# Altium PCB EST_MainV20.PcbDoc (part 2 of 8)
Units mm, origin at the board's own origin, x right, y up, seen from the top; angles counter-clockwise.
Board outline 69.72 x 115.32 mm, 2 copper layers (Top Layer, Bottom Layer); 330 components, 239 nets, 1066 pads, 416 vias.
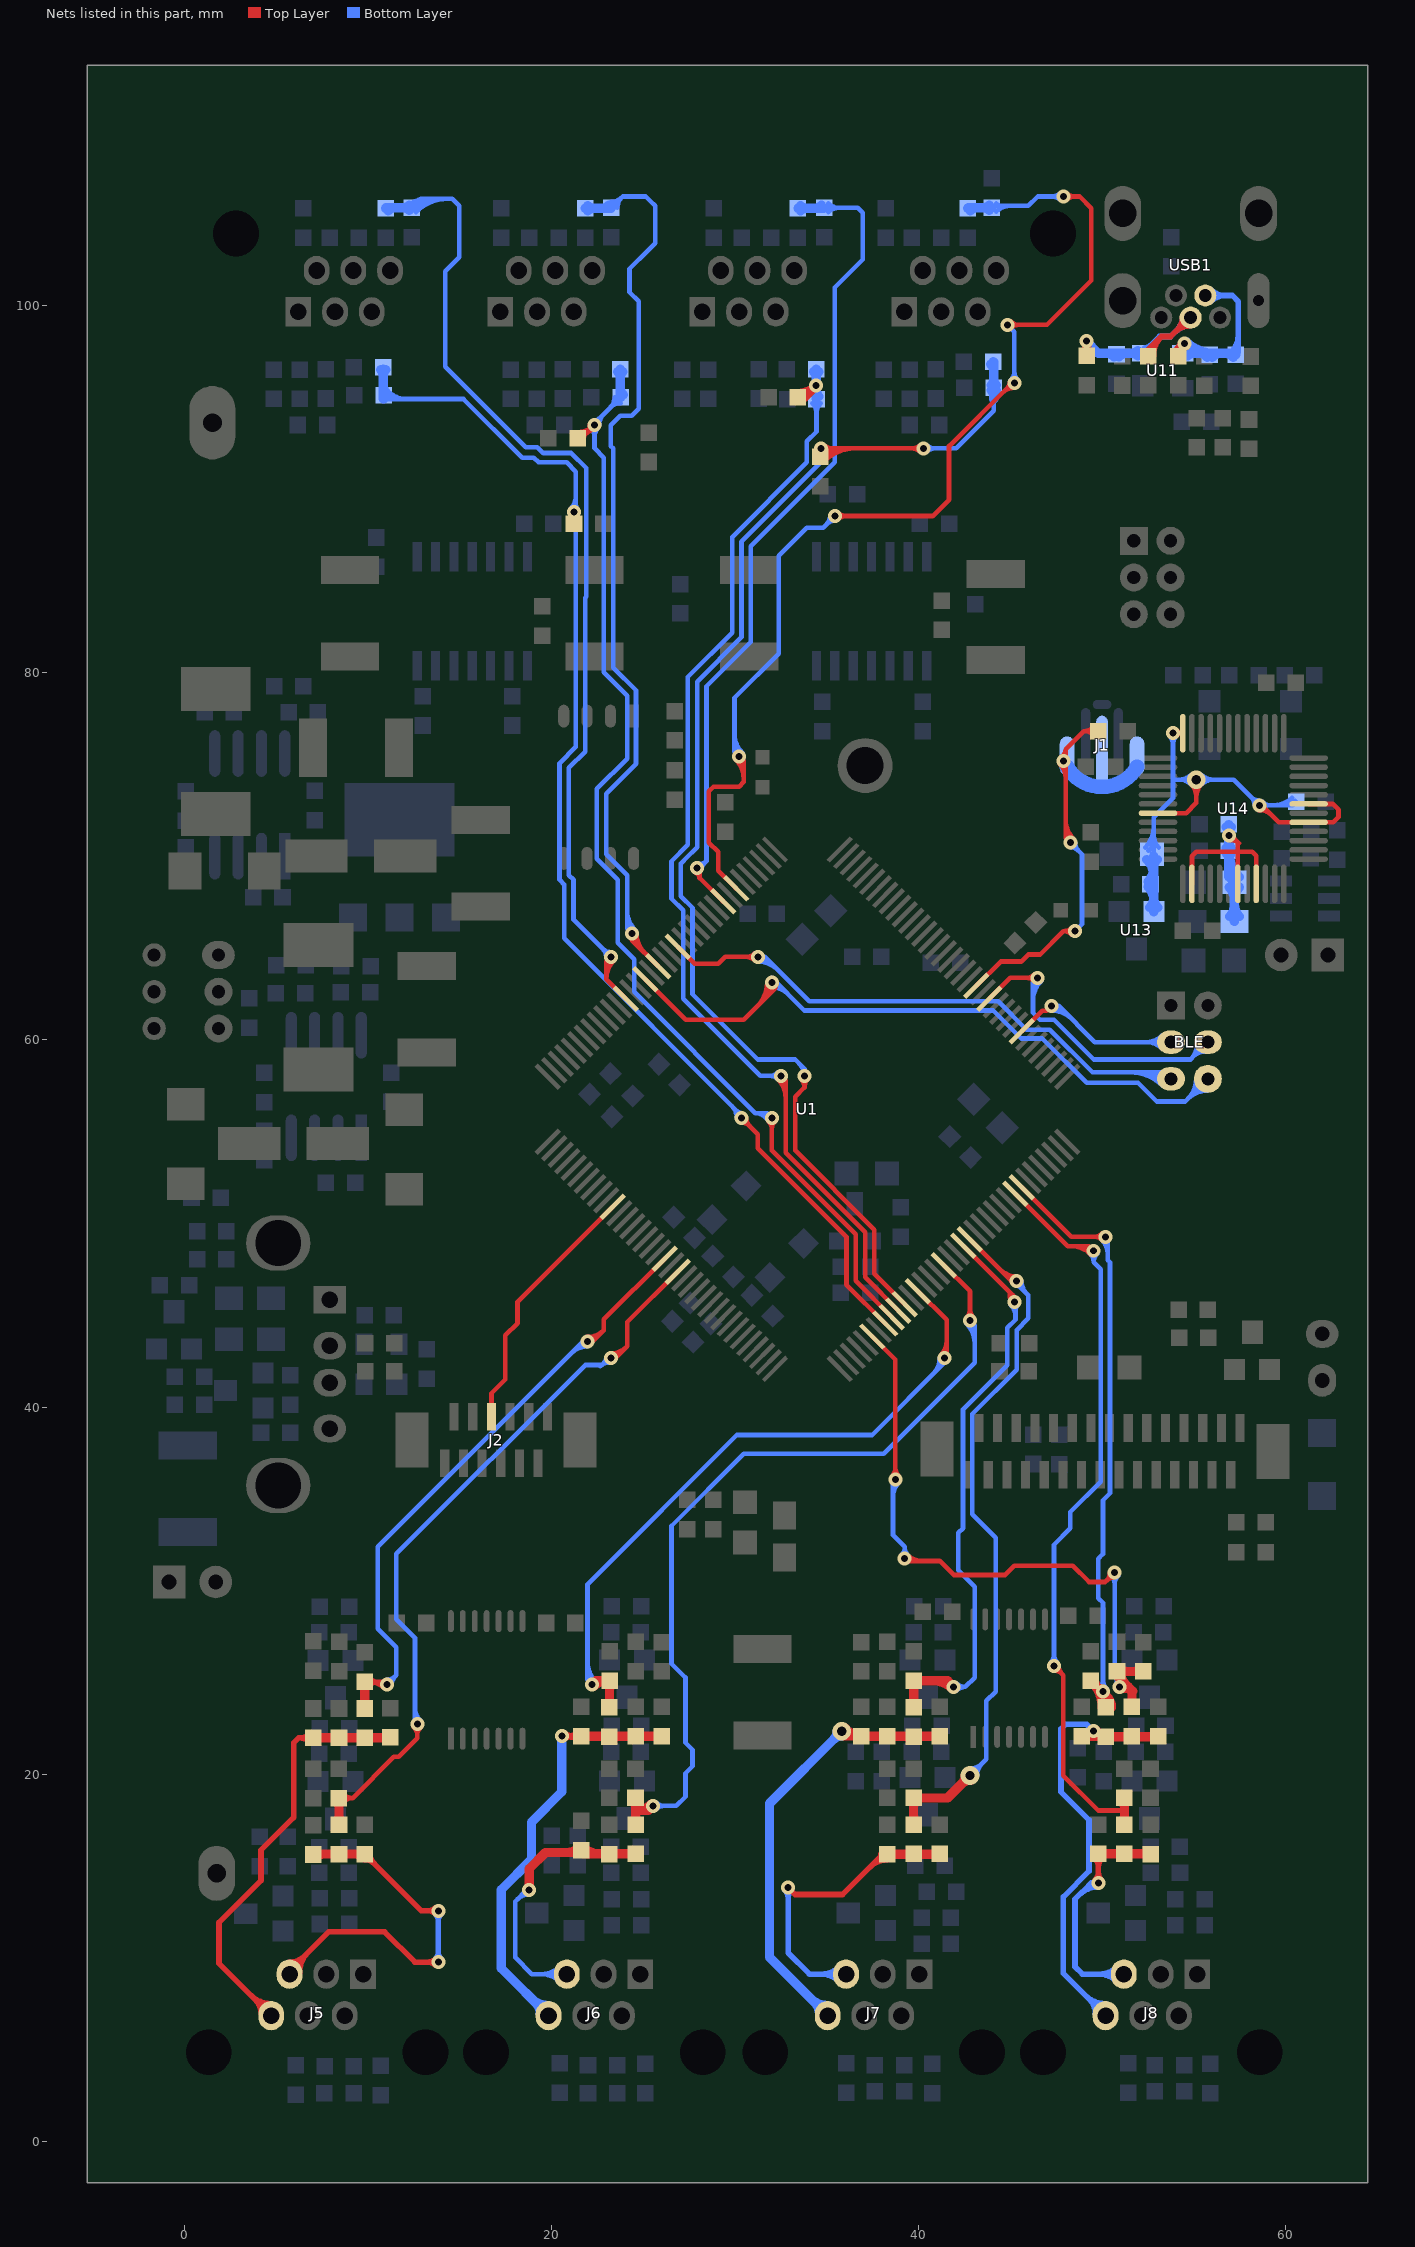
[diagram p2: the nets of this part, all layers, seen from the top]

## Via types
v1: diameter 0.762, hole 0.381, Top Layer to Bottom Layer, 258 vias
v2: diameter 1.27, hole 0.635, Top Layer to Bottom Layer, 91 vias
v3: diameter 1.016, hole 0.508, Top Layer to Bottom Layer, 66 vias
v4: diameter 1.524, hole 0.635, Top Layer to Bottom Layer, 1 vias

## Nets (pads, with @x,y where several pads share a name; then routed paths per layer and width w, separated by ;. In a path a pad name is that pad's centre, name@x,y a point inside that pad or via, vN(x,y) a via of type N, cw(c..) or ccw(c..) an arc to the next point about the centre after c; other vN are vias at no path point) (continued)
ADC_D1: C35.2 R86.2 R93.1 U1.42 | length 45.3
  Top Layer w0.254: U1.42@37.483,43.845 38.735,42.593 v1(38.735,36.068) v1@38.735,35.941 ; v1@38.555,36.248 ccw(c38.122,36.681) 38.735,36.681 ccw(c39.348,36.681) v1@38.915,36.248 ; v1(39.243,31.75) 39.37,31.623 41.148,31.623 41.91,30.861 44.704,30.861 45.212,31.369 48.387,31.369 49.276,30.48 50.165,30.48 v1(50.673,30.988) ; v1@39.423,31.93 ccw(c40.163,32.67) 40.163,31.623 ; v1@50.419,30.988 cw(c49.806,30.988) 50.239,30.554 cw(c50.673,30.121) v1@50.673,30.734
  Top Layer w0.508: R93.1@50.8,25.375 51.41,24.765 ; R93.1@50.8,25.629 50.823,25.606 C35.2@52.226,25.606 ; v1(50.927,24.765) 51.41,24.765 ; R93.1@50.939,25.767 ccw(c51.327,26.155) 51.327,25.606 ; v1@50.978,24.649 cw(c51.224,24.096) 51.651,24.524 ; R93.1@50.996,25.621 ccw(c51.977,25.586) v1@51.283,24.892 ; R86.2@51.475,23.811 ccw(c51.14,24.146) 51.613,24.146 ccw(c52.086,24.146) R86.2@51.752,23.811 ; R86.2@51.613,23.673 51.613,24.562 51.41,24.765 ; C35.2@52.088,25.468 ccw(c51.753,25.133) 51.753,25.606 ccw(c51.753,26.08) C35.2@52.088,25.745
  Bottom Layer w0.254: 38.608,35.148 cw(c39.655,35.148) v1@38.915,35.888 ; v1@38.735,35.941 38.608,35.814 38.608,33.02 39.243,32.385 v1(39.243,31.75) ; v1@39.063,31.93 ccw(c38.63,32.363) 39.243,32.363 ccw(c39.856,32.363) v1@39.423,31.93 ; v1@50.493,30.808 cw(c50.06,30.375) 50.673,30.375 cw(c51.286,30.375) v1@50.853,30.808 ; v1(50.673,30.988) 50.673,25.527 50.8,25.4 ; v1(50.927,24.765) 50.8,24.892 50.8,25.4 ; v1@51.047,24.989 cw(c51.266,25.4) 50.8,25.4
ADCMA: C43.2 R101.1 R171.2 U1.44 | length 77.3
  Top Layer w0.254: R171.2@21.037,88.343 ccw(c20.722,88.747) v1(21.235,88.747) ; v1@21.055,88.568 cw(c20.621,88.134) 21.235,88.134 cw(c21.848,88.134) v1@21.414,88.568 ; R171.2@21.235,88.088 v1(21.235,88.747) ; R171.2@21.433,88.343 cw(c21.747,88.747) v1(21.235,88.747) ; v1@30.353,55.499 cw(c30.353,54.886) 30.787,55.319 cw(c31.22,55.753) v1@30.607,55.753 ; v1(30.353,55.753) 31.242,54.864 31.242,54.102 36.068,49.276 36.068,46.674 U1.44@38.19,44.552
  Bottom Layer w0.254: C43.2@10.868,94.89 15.219,94.89 18.415,91.694 19.05,91.694 19.304,91.44 19.431,91.44 20.828,91.44 21.336,90.932 21.336,75.946 20.447,75.057 20.447,68.707 20.701,68.453 20.701,65.532 30.353,55.88 v1(30.353,55.753) ; C43.2@10.917,95.142 ccw(c11.525,95.751) 11.525,94.89 ; C43.2@11.096,95.322 ccw(c12.138,96.364) 12.138,94.89 ; v1@21.055,88.568 cw(c20.377,87.889) 21.336,87.889 ; v1@21.055,88.927 ccw(c20.377,89.605) 21.336,89.605 ; 21.336,88.379 cw(c21.603,88.379) v1@21.414,88.568 ; 21.336,89.116 ccw(c21.603,89.116) v1@21.414,88.927 ; 29.83,56.403 cw(c29.179,55.753) v1@30.099,55.753 ; 30.136,56.097 ccw(c30.353,56.314) v1@30.353,56.007
  Bottom Layer w0.508: R101.1@10.707,96.483 cw(c10.373,96.148) 10.846,96.148 cw(c11.319,96.148) R101.1@10.984,96.483 ; 10.846,95.62 ccw(c11.395,95.62) C43.2@11.007,95.232 ; R101.1@10.846,96.52 10.846,94.913 C43.2@10.868,94.89
ADCMB: C44.2 R103.1 R172.2 U1.45 | length 71.3
  Top Layer w0.254: R172.2@21.437,92.557 v1(22.352,93.472) ; R172.2@21.437,92.829 ccw(c21.437,93.487) 21.902,93.022 ; R172.2@21.437,93.083 ccw(c21.437,94.354) v1@22.336,93.455 ; R172.2@21.76,92.76 cw(c22.05,92.76) R172.2@21.845,92.965 ; 21.918,93.038 ccw(c21.484,93.472) v1@22.098,93.472 ; 21.919,93.039 cw(c22.352,92.605) v1@22.352,93.218 ; v1@31.824,55.573 cw(c31.391,55.14) 32.004,55.14 cw(c32.617,55.14) v1@32.184,55.573 ; v1(32.004,55.753) 32.004,53.975 36.576,49.403 36.576,46.873 U1.45@38.544,44.906
  Bottom Layer w0.254: v1@22.172,93.292 cw(c21.739,92.859) 22.352,92.859 cw(c22.965,92.859) v1@22.532,93.292 ; v1@22.352,93.726 ccw(c22.352,94.096) 22.614,93.834 ; v1@22.606,93.472 cw(c23.463,93.472) 22.857,94.078 ; C44.2@23.448,94.992 cw(c22.668,94.992) 23.22,94.441 cw(c23.771,93.889) C44.2@23.771,94.669 ; C44.2@23.771,94.992 22.352,93.573 v1(22.352,93.472) 22.352,92.202 22.86,91.694 22.86,80.01 24.13,78.74 24.13,75.311 22.479,73.66 22.479,69.85 23.622,68.707 23.622,65.278 24.511,64.389 24.511,62.611 31.115,56.007 ; 31.56,56.007 cw(c31.56,55.491) v1(32.004,55.753) 31.75,56.007 31.115,56.007 ; v1@31.785,55.624 ccw(c31.115,55.229) 31.115,56.007
  Bottom Layer w0.508: R103.1@23.61,96.381 cw(c23.276,96.046) 23.749,96.046 cw(c24.222,96.046) R103.1@23.888,96.381 ; 23.749,95.519 ccw(c24.298,95.519) C44.2@23.91,95.131 ; R103.1@23.749,96.52 23.749,95.014 C44.2@23.771,94.992
ADCMC: C51.2 R119.1 R173.2 U1.46 | length 68.1
  Top Layer w0.254: v1@32.332,57.859 cw(c31.286,56.813) 32.766,56.813 ; 32.766,57.426 ccw(c31.899,57.426) v1(32.512,58.039) 32.766,57.785 32.766,53.848 37.084,49.53 37.084,47.072 U1.46@38.897,45.259
  Top Layer w0.508: R173.2@33.426,94.996 33.782,94.996 v1(34.417,95.631) ; R173.2@33.426,95.192 ccw(c33.426,96.523) v1@34.367,95.581
  Bottom Layer w0.254: v1@32.332,57.859 ccw(c31.899,57.426) 31.899,58.039 ccw(c31.899,58.652) v1@32.332,58.219 ; v1@32.766,58.039 v1(32.512,58.039) 31.369,58.039 27.178,62.23 27.178,67.056 26.543,67.691 26.543,68.707 26.543,69.723 27.432,70.612 27.432,79.756 29.845,82.169 29.845,87.376 33.909,91.44 33.909,92.583 34.439,93.113 C51.2@34.439,94.89 ; C51.2@34.211,94.662 cw(c33.659,94.111) 34.439,94.111 cw(c35.219,94.111) C51.2@34.668,94.662
  Bottom Layer w0.508: R119.1@34.278,96.381 cw(c33.944,96.046) 34.417,96.046 cw(c34.89,96.046) R119.1@34.556,96.381 ; C51.2@34.417,94.913 v1(34.417,95.631) R119.1@34.417,96.52 ; v1@34.417,95.417 ccw(c34.966,95.417) C51.2@34.578,95.029
ADCMD: C52.2 R121.1 R174.2 U1.47 | length 81.5
  Top Layer w0.254: v1@33.602,57.859 cw(c33.169,57.426) 33.782,57.426 cw(c34.395,57.426) v1@33.962,57.859 ; v1(33.782,58.039) 33.782,57.404 33.274,56.896 33.274,53.975 37.592,49.657 37.592,47.271 U1.47@39.251,45.613 ; R174.2@34.336,92.055 cw(c34.69,91.7) v1@34.69,92.202 ; R174.2@34.515,91.875 cw(c35.304,91.087) 35.304,92.202 ; v1(34.671,92.202) v1(40.259,92.202) ; R174.2@34.695,91.696 cw(c35.917,90.474) 35.917,92.202 ; R174.2@34.851,92.022 cw(c35.284,91.589) 35.284,92.202 cw(c35.284,92.815) v1@34.851,92.382 ; R174.2@34.874,91.516 cw(c36.53,89.861) 36.53,92.202 ; v1@40.079,92.022 ccw(c39.646,91.589) 39.646,92.202 ccw(c39.646,92.815) v1@40.079,92.382
  Bottom Layer w0.254: 27.178,69.723 27.305,69.85 ; 33.515,58.687 cw(c32.87,58.042) v1(33.782,58.039) 33.782,58.42 33.274,58.928 31.242,58.928 27.686,62.484 27.686,67.183 27.051,67.818 27.051,69.596 27.305,69.85 ; v1@34.491,92.022 cw(c34.058,91.589) 34.671,91.589 cw(c35.284,91.589) v1@34.851,92.022 ; v1(34.671,92.202) 34.671,91.44 30.353,87.122 30.353,81.915 27.94,79.502 27.94,70.485 27.305,69.85 ; v1(40.259,92.202) 42.037,92.202 44.091,94.256 44.091,94.89 ; v1@40.439,92.022 cw(c40.872,91.589) 40.872,92.202 cw(c40.872,92.815) v1@40.439,92.382
  Bottom Layer w0.508: R121.1@43.93,96.787 cw(c43.542,96.399) 44.091,96.399 ; C52.2@43.953,95.361 cw(c43.618,95.027) 44.091,95.027 cw(c44.564,95.027) C52.2@44.23,95.361 ; C52.2@43.953,95.639 ccw(c43.618,95.973) 44.091,95.973 ccw(c44.564,95.973) C52.2@44.23,95.639 ; R121.1@44.069,96.926 44.091,96.904 C52.2@44.091,95.5 44.091,94.89
AVDD: C72.2 C79.2 C80.2 R164.1 U14.38 U14.43 U14.45 | length 22.4
  Top Layer w0.254: U14.38@54.883,68.493 54.883,69.996 55.118,70.231 57.383,70.231 ; v1@56.932,70.869 cw(c57.017,70.267) 57.446,70.697 ; v1@57.023,71.12 57.383,70.76 57.383,70.231 ; v1@57.15,71.12 ccw(c57.457,71.12) 57.24,70.903 ; U14.43@57.383,68.493 57.383,70.231 ; U14.45@58.383,68.493 58.383,70.014 58.166,70.231 57.383,70.231
  Bottom Layer w0.508: C79.2@56.754,70.165 cw(c56.42,69.83) 56.893,69.83 cw(c57.366,69.83) C79.2@57.031,70.165 ; C79.2@56.754,70.442 ccw(c56.42,70.776) 56.893,70.776 ccw(c57.366,70.776) C79.2@57.031,70.442 ; C80.2@56.754,71.587 cw(c56.42,71.252) 56.893,71.252 cw(c57.366,71.252) C80.2@57.031,71.587 ; C79.2@56.893,70.261 ccw(c58.872,70.261) C72.2@57.472,68.862 ; C80.2@56.893,71.726 C79.2@56.893,70.303 56.893,68.881 C72.2@57.192,68.582 57.192,66.453 R164.1@57.201,66.445 ; C72.2@56.912,68.302 cw(c56.236,67.626) 57.192,67.626 cw(c58.148,67.626) C72.2@57.472,68.302 ; R164.1@56.931,66.714 ccw(c56.301,67.344) 57.192,67.344 ; 57.192,67.385 ccw(c58.141,67.385) R164.1@57.47,66.714
  other v1: 56.896,71.12
BELL: J1.1 R1.1 U1.87 | length 25.8
  Top Layer w0.254: U1.87@43.14,62.937 44.465,64.262 45.593,64.262 45.974,64.643 46.609,64.643 47.879,65.913 v1(48.514,65.913) ; v1@47.699,75.004 cw(c46.959,74.264) 48.006,74.264 ; v1@47.759,75.408 ccw(c47.54,75.819) 48.006,75.819 ; 48.006,71.352 ccw(c48.873,71.352) v1(48.26,70.739) 48.006,70.993 48.006,75.819 ; 48.006,71.965 ccw(c49.486,71.965) v1@48.44,70.919 ; v1@48.334,65.733 ccw(c47.901,65.3) 47.901,65.913 ccw(c47.901,66.526) v1@48.334,66.093 ; R1.1@49.556,76.581 ccw(c49.004,76.029) 49.004,76.809 ccw(c49.004,77.589) R1.1@49.556,77.038 ; R1.1@49.784,76.581 R1.1@49.784,76.809 48.996,76.809 48.006,75.819
  Bottom Layer w0.254: v1@48.26,70.485 cw(c48.26,69.872) 48.694,70.305 cw(c49.127,70.739) v1@48.514,70.739 ; v1(48.26,70.739) 48.895,70.104 48.895,66.294 v1(48.514,65.913)
  other v1: 47.879,75.184
BLE_IO1: BLE.3 U1.80 | length 13.4
  Top Layer w0.254: U1.80@45.615,60.462 46.742,61.589 46.984,61.589 v1(47.244,61.849)
  Bottom Layer w0.254: v1@47.244,61.595 cw(c47.244,60.062) 48.328,61.146 ; 47.894,61.58 ccw(c47.244,60.929) v1(47.244,61.849) 47.625,61.849 49.6,59.874 BLE.3@53.746,59.874 ; BLE.3@53.26,59.515 ccw(c52.393,58.648) 52.393,59.874 ccw(c52.393,61.101) BLE.3@53.26,60.234
BLE_IO2: BLE.4 U1.85 | length 21
  Top Layer w0.254: U1.85@43.847,62.23 44.99,63.373 v1(46.482,63.373) ; v1@46.302,63.193 ccw(c45.869,62.76) 45.869,63.373 ccw(c45.869,63.986) v1@46.302,63.553
  Bottom Layer w0.254: 46.228,62.147 cw(c47.708,62.147) v1@46.662,63.193 ; 46.228,62.76 cw(c47.095,62.76) v1(46.482,63.373) 46.228,63.119 46.228,61.468 46.609,61.087 47.371,61.087 49.53,58.928 54.8,58.928 BLE.4@55.746,59.874 ; 54.864,58.992 ccw(c54.217,59.638) BLE.4@55.118,59.79 ; 54.969,59.097 cw(c55.619,58.447) BLE.4@55.619,59.366 ; 55.212,59.34 ccw(c54.813,59.738) BLE.4@55.369,59.832
BLE_RX: BLE.5 U1.124 | length 37.4
  Top Layer w0.254: U1.124@26.876,65.058 27.8,64.135 29.083,64.135 29.464,64.516 v1(31.242,64.516) ; v1@31.062,64.336 ccw(c30.629,63.903) 30.629,64.516 ccw(c30.629,65.129) v1@31.062,64.696
  Bottom Layer w0.254: v1@31.242,64.262 cw(c31.242,62.729) 32.326,63.813 ; 31.892,64.247 ccw(c31.242,63.596) v1(31.242,64.516) 31.623,64.516 34.036,62.103 44.323,62.103 45.872,60.554 47.142,60.554 49.467,58.229 53.391,58.229 BLE.5@53.746,57.874 ; 51.536,58.229 cw(c51.536,55.791) BLE.5@53.26,57.515 ; 52.149,58.229 cw(c52.149,56.404) BLE.5@53.44,57.695 ; 52.762,58.229 cw(c52.762,57.017) BLE.5@53.619,57.874
BLE_TX: BLE.6 U1.129 | length 44.9
  Top Layer w0.254: U1.129@25.109,63.29 27.312,61.087 30.48,61.087 32.004,62.611 ; 31.211,61.818 ccw(c29.91,63.119) v1@31.75,63.119 ; 31.645,62.252 ccw(c30.778,63.119) v1(32.004,63.119) 32.004,62.611 ; v1@31.852,62.916 cw(c31.623,62.611) 32.004,62.611 ; 32.078,62.685 ccw(c31.645,63.119) v1@32.258,63.119 ; v1@32.156,62.916 ccw(c32.385,62.611) 32.004,62.611
  Bottom Layer w0.254: v1@32.004,62.865 cw(c32.004,61.639) 32.871,62.506 ; v1(32.004,63.119) cw(c32.004,62.506) 32.438,62.939 ; v1@32.004,63.373 33.782,61.595 44.069,61.595 45.593,60.071 46.736,60.071 49.149,57.658 51.943,57.658 52.959,56.642 54.514,56.642 BLE.6@55.746,57.874 ; BLE.6@55.111,57.874 cw(c53.578,57.874) 54.662,56.79 cw(c55.746,55.706) BLE.6@55.746,57.239 ; BLE.6@55.365,57.874 cw(c54.446,57.874) 55.096,57.224 cw(c55.746,56.574) BLE.6@55.746,57.493
BLUE: J2.7 U1.11 | length 14.6
  Top Layer w0.254: J2.7@16.652,40.059 ccw(c16.442,40.269) 16.739,40.269 ccw(c17.036,40.269) J2.7@16.826,40.059 ; J2.7@16.739,39.472 16.739,40.742 17.499,41.502 17.499,43.915 18.161,44.577 18.161,45.736 U1.11@23.341,50.916
CVDD: C73.1 C74.2 C75.2 U13.1 U14.5 U14.7 U14.24 U14.31 | length 46.4
  Top Layer w0.254: U14.31@53.033,72.343 54.563,72.343 55.118,72.898 v3(55.118,74.168) ; v1(53.848,76.708) U14.24@54.368,76.708 ; v1@54.048,76.552 cw(c54.368,76.302) U14.24@54.368,76.708 ; v1@54.048,76.864 ccw(c54.368,77.114) U14.24@54.368,76.708 ; U14.24@54.383,76.693 U14.24@54.368,76.708 ; v3@54.849,73.899 cw(c54.198,73.248) 55.118,73.248 cw(c56.038,73.248) v3@55.387,73.899 ; v1@58.547,72.517 cw(c58.547,71.597) 59.197,72.248 ; v1@58.674,72.771 59.602,71.843 U14.5@61.233,71.843 62.572,71.843 62.865,72.136 62.865,72.517 62.539,72.843 U14.7@61.233,72.843 ; v1@58.801,72.771 ccw(c59.108,72.771) 58.891,72.554
  Bottom Layer w0.254: C73.1@52.334,70.472 ccw(c51.192,71.614) 52.807,71.614 ; C73.1@52.513,70.293 ccw(c51.806,71) 52.807,71 ; C73.1@52.807,69.999 C73.1@52.704,70.102 52.807,70.205 52.807,72.111 53.848,73.152 53.848,74.168 ; 52.807,71.116 ccw(c53.718,71.116) C73.1@53.073,70.472 ; v1@53.668,76.528 cw(c53.235,76.095) 53.848,76.095 cw(c54.461,76.095) v1@54.028,76.528 ; v1(53.848,76.708) 53.848,74.168 ; v3@54.849,73.899 ccw(c54.198,73.248) 54.198,74.168 ccw(c54.198,75.088) v3@54.849,74.437 ; v3@55.387,73.899 cw(c56.038,73.248) 56.038,74.168 cw(c56.038,75.088) v3@55.387,74.437 ; v1@58.293,72.771 ccw(c57.68,72.771) 58.113,73.205 ccw(c58.547,73.638) v1@58.547,73.025 ; v1@58.727,72.591 cw(c59.16,72.158) 59.16,72.771 cw(c59.16,73.384) v1@58.727,72.951 ; 59.338,72.771 ccw(c59.338,74.171) C75.2@60.328,73.181 ; 59.951,72.771 ccw(c59.951,73.558) C75.2@60.508,73.002 ; C75.2@60.557,72.953 60.375,72.771 v1(58.547,72.771) 57.15,74.168 v3(55.118,74.168) 53.848,74.168
  Bottom Layer w0.508: C73.1@52.424,69.822 cw(c51.499,68.898) C74.2@52.807,68.898 ; C74.2@52.487,68.336 cw(c51.716,67.564) 52.807,67.564 ; C74.2@52.487,68.613 ccw(c51.716,69.385) 52.807,69.385 ; U13.1@52.582,67.204 ccw(c52.04,67.746) 52.807,67.746 ccw(c53.573,67.746) U13.1@53.031,67.204 ; U13.1@52.807,66.98 C73.1@52.807,69.999 ; 52.807,69.395 cw(c53.411,69.395) C73.1@52.984,69.822
D+: C67.2 R148.2 R149.2 U11.2 USB1.3 | length 20.3
  Top Layer w0.305: R148.2@52.495,97.231 cw(c53.264,97.261) 52.72,97.805 ; R148.2@52.502,97.231 52.502,97.587 53.213,98.298 ; R148.2@52.8,97.243 cw(c54.213,97.297) 53.213,98.298 ; 53.943,98.52 cw(c54.81,97.653) USB1.3@54.81,98.879 ; 54.089,98.666 ccw(c53.427,99.327) USB1.3@54.362,99.327 ; USB1.3@54.81,99.327 54.75,99.327 53.721,98.298 53.213,98.298
  Top Layer w0.508: C67.2@49.006,97.385 ccw(c48.662,97.729) v1@49.149,97.729 ; C67.2@49.145,97.247 49.149,97.251 v1(49.149,98.044) ; v1@49.149,97.71 ccw(c49.609,97.71) C67.2@49.284,97.385 ; R148.2@52.502,97.231 R148.2@52.502,97.333
  Bottom Layer w0.305: U11.2@52.197,97.384 53.111,98.298 53.721,98.298 54.75,99.327 USB1.3@54.81,99.327 ; U11.2@52.324,97.688 ccw(c52.324,98.118) U11.2@52.628,97.814 ; U11.2@52.629,97.384 cw(c53.671,97.384) 52.934,98.121 ; 53.943,98.52 cw(c54.81,97.653) USB1.3@54.81,98.879 ; 54.089,98.666 ccw(c53.427,99.327) USB1.3@54.362,99.327
  Bottom Layer w0.508: v1(49.149,98.044) 49.149,98.019 49.784,97.384 50.723,97.384 R149.2@50.774,97.333 ; 50.178,97.384 cw(c50.178,96.736) R149.2@50.636,97.194 ; R149.2@50.774,97.384 U11.2@52.197,97.384 U11.2@52.553,97.384 ; R149.2@50.913,97.194 cw(c51.371,96.736) 51.371,97.384 ; U11.2@51.926,97.24 ccw(c51.579,96.893) 51.579,97.384 ccw(c51.579,97.874) U11.2@51.926,97.527
D-: C63.1 R143.1 R146.2 U11.3 USB1.2 | length 18.1
  Top Layer w0.508: R146.2@54.128,97.145 cw(c54.861,97.145) v1@54.539,97.803 ; R146.2@54.128,97.231 54.128,97.562 v1(54.483,97.917) ccw(c54.942,97.458) R146.2@54.317,97.284
  Bottom Layer w0.305: USB1.2@55.61,100.527 57.08,100.527 57.404,100.203 57.404,97.441 C63.1@57.273,97.31 ; USB1.2@55.926,100.21 cw(c56.691,99.446) 56.691,100.527 cw(c56.691,101.607) USB1.2@55.926,100.843 ; C63.1@57.063,97.521 ccw(c56.238,98.345) 57.404,98.345
  Bottom Layer w0.508: U11.3@54.214,97.648 ccw(c54.851,98.285) U11.3@54.851,97.384 ; U11.3@54.381,97.384 54.483,97.485 v1(54.483,97.917) ; U11.3@54.483,97.384 57.2,97.384 C63.1@57.273,97.31 ; v1@54.573,98.007 ccw(c56.077,99.511) R143.1@56.077,97.384 ; U11.3@54.652,97.24 cw(c54.999,96.893) 54.999,97.384 cw(c54.999,97.874) U11.3@54.652,97.527 ; 55.198,97.384 cw(c55.198,96.65) R143.1@55.716,97.169 ; R143.1@55.994,97.169 cw(c56.512,96.65) 56.512,97.384 ; 56.623,97.384 cw(c56.623,96.66) C63.1@57.134,97.172
DIGIA0: C23.1 R69.2 U1.21 | length 46.8
  Top Layer w0.254: C23.1@8.434,18.721 C23.1@8.434,18.71 9.185,18.71 ; C23.1@8.668,18.488 cw(c9.185,17.998) 9.185,18.71 ; C23.1@8.668,18.932 ccw(c9.185,19.421) 9.185,18.71 ; v1@12.52,22.553 cw(c12.087,22.12) 12.7,22.12 cw(c13.313,22.12) v1@12.88,22.553 ; v1(12.7,22.733) 12.7,21.971 11.684,20.955 11.43,20.955 9.185,18.71 ; v1@23.241,42.926 ccw(c23.241,44.152) 24.108,43.285 ; 23.675,42.852 cw(c23.241,43.285) v1(23.241,42.672) 23.495,42.672 24.13,43.307 24.13,44.634 U1.21@26.876,47.381
  Top Layer w0.508: C23.1@8.295,18.571 cw(c7.95,18.226) 8.438,18.226 ; R69.2@8.299,17.403 ccw(c7.965,17.738) 8.438,17.738 ccw(c8.911,17.738) R69.2@8.577,17.403 ; R69.2@8.438,17.265 C23.1@8.438,18.705 ; 8.438,18.247 cw(c8.896,18.247) C23.1@8.572,18.571
  Bottom Layer w0.254: 12.573,23.653 ccw(c13.62,23.653) v1@12.88,22.913 ; v1(12.7,22.733) 12.573,22.86 12.573,27.432 11.557,28.448 11.557,32.004 21.844,42.291 22.733,42.291 23.114,42.672 v1(23.241,42.672) ; 22.67,42.228 cw(c23.142,41.755) v1@23.214,42.419 ; 22.897,42.455 ccw(c22.68,42.672) v1@22.987,42.672
DIGIA1: C32.2 R79.1 U1.19 | length 41.4
  Top Layer w0.254: C32.2@9.839,25.04 10.901,25.04 v1(11.049,24.892) ccw(c10.691,24.534) 10.691,25.04 ; C32.2@10.067,24.812 cw(c10.618,24.261) 10.618,25.04 cw(c10.618,25.82) C32.2@10.067,25.269 ; C32.2@10.077,25.04 cw(c10.077,23.92) v1@10.869,24.712 ; v1@21.971,43.815 ccw(c21.971,45.041) 22.838,44.174 ; 22.405,43.741 cw(c21.971,44.174) v1(21.971,43.561) 22.225,43.561 22.86,44.196 22.86,44.779 U1.19@26.169,48.088
  Top Layer w0.508: R79.1@9.696,23.728 ccw(c9.361,24.063) 9.834,24.063 ccw(c10.307,24.063) R79.1@9.973,23.728 ; C32.2@9.7,24.902 cw(c9.376,24.578) 9.834,24.578 ; R79.1@9.834,23.589 C32.2@9.834,25.036 ; 9.834,24.557 cw(c10.322,24.557) C32.2@9.977,24.902
  Bottom Layer w0.254: v1(11.049,24.892) 11.557,25.4 11.557,26.924 10.541,27.94 10.541,32.385 21.717,43.561 v1(21.971,43.561) ; v1@11.049,25.146 ccw(c11.049,25.759) 11.483,25.326 ccw(c11.916,24.892) v1@11.303,24.892 ; 21.104,42.948 cw(c21.971,42.081) v1@21.971,43.307 ; 21.537,43.381 cw(c21.971,42.948) v1(21.971,43.561) ; v1@22.225,43.561 v1(21.971,43.561)
DIGIAI0: J5.5 R61.2 R65.1 R69.1 | length 30.6
  Top Layer w0.305: J5.5@5.746,9.124 5.746,9.302 7.874,11.43 10.922,11.43 12.573,9.779 v1(13.843,9.779) ; J5.5@5.746,9.771 ccw(c5.746,10.904) 6.547,10.103 ; J5.5@5.989,9.224 cw(c6.764,9.224) 6.216,9.772 ; J5.5@6.294,9.224 cw(c7.805,9.224) 6.736,10.292 ; R65.1@9.835,15.367 cw(c9.835,14.649) 10.343,15.157 cw(c10.851,15.665) R65.1@10.133,15.665 ; R65.1@9.835,15.665 12.927,12.573 v1(13.843,12.573) ; v1@13.681,9.617 ccw(c13.291,9.227) 13.291,9.779 ccw(c13.291,10.331) v1@13.681,9.941 ; v1@13.681,12.411 ccw(c13.291,12.021) 13.291,12.573 ccw(c13.291,13.125) v1@13.681,12.735
  Top Layer w0.508: R61.2@7.065,15.665 R69.1@8.438,15.665 R65.1@9.835,15.665 ; R61.2@7.179,15.501 cw(c7.574,15.105) 7.574,15.665 ; R69.1@8.299,15.526 ccw(c7.965,15.192) 7.965,15.665 ccw(c7.965,16.138) R69.1@8.299,15.803 ; R69.1@8.577,15.526 cw(c8.911,15.192) 8.911,15.665 cw(c8.911,16.138) R69.1@8.577,15.803 ; R65.1@9.696,15.526 ccw(c9.362,15.192) 9.362,15.665 ccw(c9.362,16.138) R65.1@9.696,15.803
  Bottom Layer w0.305: v1@13.681,9.941 ccw(c13.291,10.331) 13.843,10.331 ccw(c14.395,10.331) v1@14.005,9.941 ; v1@13.681,12.411 cw(c13.291,12.021) 13.843,12.021 cw(c14.395,12.021) v1@14.005,12.411 ; v1(13.843,9.779) v1(13.843,12.573)
DIGIAI1: J5.6 R79.2 R80.1 R87.1 R88.1 | length 31.1
  Top Layer w0.305: 3.64,7.975 ccw(c4.746,9.081) J5.6@4.746,7.517 ; 3.882,7.734 cw(c3.118,6.97) J5.6@4.198,6.97 ; 4.161,7.455 ccw(c4.746,8.04) J5.6@4.746,7.212 ; J5.6@4.746,6.87 1.905,9.711 1.905,11.938 4.191,14.224 4.191,15.875 5.969,17.653 5.969,21.717 6.241,21.989 R87.1@7.041,21.989 ; R87.1@6.831,21.779 ccw(c6.323,21.271) 6.323,21.989 ccw(c6.323,22.708) R87.1@6.831,22.2
  Top Layer w0.508: R87.1@7.041,21.989 R88.1@8.438,21.989 R80.1@11.207,21.989 ; R87.1@7.18,21.851 cw(c7.515,21.516) 7.515,21.989 cw(c7.515,22.462) R87.1@7.18,22.128 ; R88.1@8.3,21.851 ccw(c7.965,21.516) 7.965,21.989 ccw(c7.965,22.462) R88.1@8.3,22.128 ; R88.1@8.577,21.851 cw(c8.912,21.516) 8.912,21.989 cw(c8.912,22.462) R88.1@8.577,22.128 ; R79.2@9.696,21.851 ccw(c9.361,21.516) 9.361,21.989 ccw(c9.361,22.463) R79.2@9.696,22.128 ; R79.2@9.973,21.851 cw(c10.307,21.516) 10.307,21.989 cw(c10.307,22.463) R79.2@9.973,22.128 ; 10.697,21.989 ccw(c10.697,22.549) R80.1@11.093,22.153
DIGIB0: C25.1 R70.2 U1.53 | length 54.5
  Top Layer w0.254: U1.53@41.372,47.734 42.799,46.307 v1(42.799,44.704) ; v1@42.619,44.884 ccw(c42.186,45.317) 42.799,45.317 ccw(c43.412,45.317) v1@42.979,44.884
  Top Layer w0.508: R70.2@24.449,17.41 ccw(c24.125,17.734) 24.583,17.734 ; R70.2@24.583,17.276 24.583,18.034 ; 24.583,17.756 ccw(c25.071,17.756) R70.2@24.726,17.41 ; C25.1@24.583,18.717 24.583,18.034 ; 24.607,18.034 ccw(c24.607,19.208) v1@25.437,18.378 ; v1(25.527,18.288) 25.273,18.034 24.583,18.034 ; C25.1@24.445,18.578 cw(c24.11,18.244) 24.583,18.244 ; C25.1@24.445,18.578 cw(c24.11,18.244) 24.583,18.244 ; C25.1@24.445,18.578 cw(c24.11,18.244) 24.583,18.244 ; C25.1@24.445,18.578 cw(c24.11,18.244) 24.583,18.244 ; 24.583,18.244 cw(c25.056,18.244) C25.1@24.722,18.578 ; 24.583,18.244 cw(c25.056,18.244) C25.1@24.722,18.578 ; 24.583,18.244 cw(c25.056,18.244) C25.1@24.722,18.578 ; 24.583,18.244 cw(c25.056,18.244) C25.1@24.722,18.578
  Bottom Layer w0.254: v1(25.527,18.288) 26.797,18.288 27.305,18.796 27.305,20.066 27.686,20.447 27.686,21.336 27.305,21.717 27.305,25.273 26.543,26.035 26.543,33.528 30.48,37.465 38.1,37.465 43.053,42.418 43.053,44.45 v1(42.799,44.704) cw(c42.186,44.091) 43.053,44.091 ; v1@25.707,18.108 cw(c26.14,17.675) 26.14,18.288 cw(c26.14,18.901) v1@25.707,18.468 ; v1@42.619,44.524 cw(c41.573,43.478) 43.053,43.478
DIGIB1: C33.2 R81.1 U1.49 | length 44.2
  Top Layer w0.254: U1.49@39.958,46.32 41.529,44.749 41.529,42.799 v1(41.402,42.672) ; v1@41.222,42.852 ccw(c40.482,43.592) 41.529,43.592
  Top Layer w0.508: v1(22.225,24.892) 22.431,25.098 C33.2@23.169,25.098 23.169,23.652 R81.1@23.164,23.647 ; v1@22.315,24.802 cw(c23.03,24.087) C33.2@23.03,25.098 ; R81.1@23.026,23.786 ccw(c22.681,24.131) 23.169,24.131 ; C33.2@23.03,25.237 cw(c22.696,25.572) 22.696,25.098 cw(c22.696,24.625) 23.03,24.96 cw(c22.696,24.625) 23.169,24.625 cw(c23.642,24.625) C33.2@23.307,24.96 ; 23.169,24.11 ccw(c23.627,24.11) R81.1@23.303,23.786
  Bottom Layer w0.254: 21.971,25.505 ccw(c22.838,25.505) v1(22.225,24.892) 21.971,25.146 21.971,30.353 30.099,38.481 37.465,38.481 41.402,42.418 v1(41.402,42.672) cw(c40.789,42.672) 41.222,42.238 ; 21.971,26.118 ccw(c23.451,26.118) v1@22.405,25.072 ; 40.789,41.805 ccw(c39.922,42.672) v1@41.148,42.672
DIGIBI0: J6.5 R62.2 R66.1 R70.1 | length 22.1
  Top Layer w0.508: v1(18.796,13.716) 18.796,14.859 19.685,15.748 21.514,15.748 R66.1@21.641,15.875 ; 20.861,15.748 ccw(c20.861,16.655) R66.1@21.503,16.014 ; R66.1@21.743,15.672 R70.1@24.588,15.672 ; R66.1@21.78,16.014 ccw(c22.605,16.839) 22.605,15.672 ; 22.63,15.672 cw(c22.63,15.113) R62.2@23.026,15.508 ; R62.2@23.139,15.672 R62.2@23.164,15.647 ; R62.2@23.303,15.508 cw(c23.698,15.113) 23.698,15.672 ; R70.1@24.449,15.533 ccw(c24.114,15.199) 24.114,15.672 ccw(c24.114,16.145) R70.1@24.449,15.81
  Bottom Layer w0.254: 18.146,13.193 cw(c18.796,12.542) v1@18.796,13.462 ; 18.452,13.499 ccw(c18.235,13.716) v1@18.542,13.716 ; v1(18.796,13.716) 18.669,13.716 18.034,13.081 18.034,10.033 18.943,9.124 J6.5@20.846,9.124 ; J6.5@20.441,8.719 ccw(c19.463,7.74) 19.463,9.124 ccw(c19.463,10.507) J6.5@20.441,9.529 ; J6.5@20.62,8.898 ccw(c20.076,8.354) 20.076,9.124 ccw(c20.076,9.894) J6.5@20.62,9.349
DIGIBI1: J6.6 R81.2 R82.1 R89.1 R90.1 | length 30.6
  Top Layer w0.356: v1(20.574,22.098) 20.599,22.073 20.955,22.073 ; v1@20.718,21.954 cw(c21.003,21.669) 21.003,22.073 ; v1@20.718,22.242 ccw(c21.126,22.65) 21.126,22.073 ; v1@20.803,22.073 20.955,22.073 ; R82.1@21.449,21.88 ccw(c20.984,21.415) 20.984,22.073 ccw(c20.984,22.73) R82.1@21.449,22.265 ; R82.1@21.641,22.073 20.955,22.073
  Top Layer w0.508: R82.1@21.641,22.073 R90.1@24.588,22.073 R89.1@26.01,22.073 ; R82.1@21.78,21.934 cw(c22.114,21.599) 22.114,22.073 cw(c22.114,22.546) R82.1@21.78,22.211 ; 22.63,22.073 cw(c22.63,21.513) R81.2@23.026,21.909 ; R81.2@23.139,22.073 R81.2@23.164,22.047 ; R81.2@23.303,21.909 cw(c23.698,21.513) 23.698,22.073 ; R90.1@24.449,21.934 ccw(c24.114,21.599) 24.114,22.073 ccw(c24.114,22.546) R90.1@24.449,22.211 ; R90.1@24.726,21.934 cw(c25.061,21.599) 25.061,22.073 cw(c25.061,22.546) R90.1@24.726,22.211 ; R89.1@25.871,21.934 ccw(c25.537,21.599) 25.537,22.073 ccw(c25.537,22.546) R89.1@25.871,22.211
  Bottom Layer w0.508: 18.914,7.802 ccw(c19.846,8.734) J6.6@19.846,7.416 ; 19.155,7.56 cw(c18.565,6.97) J6.6@19.4,6.97 ; J6.6@19.846,6.87 17.272,9.444 17.272,13.716 18.923,15.367 18.923,17.399 20.574,19.05 v1(20.574,22.098)
DIGIC0: C27.1 R71.2 U1.57 | length 45.2
  Top Layer w0.254: U1.57@42.786,49.148 45.072,46.863 v1(45.339,46.863) cw(c45.339,47.509) 44.882,47.052 ; 44.449,47.486 ccw(c45.339,48.376) v1@45.339,47.117
  Top Layer w0.508: C27.1@39.583,18.578 cw(c39.248,18.244) 39.722,18.244 cw(c40.195,18.244) 39.86,18.578 cw(c40.195,18.244) 40.195,18.717 cw(c40.195,19.19) C27.1@39.86,18.855 ; R71.2@39.587,17.41 ccw(c39.263,17.734) 39.722,17.734 ; 39.722,17.756 ccw(c40.21,17.756) R71.2@39.865,17.41 ; R71.2@39.726,17.272 39.722,17.276 C27.1@39.722,18.717 41.577,18.717 v3(42.799,19.939) ; v3@42.545,19.939 cw(c41.932,19.939) 42.365,19.505 cw(c42.799,19.072) v3@42.799,19.685
  Bottom Layer w0.254: v3(42.799,19.939) 43.688,20.828 43.688,24.003 44.196,24.511 44.196,32.893 42.926,34.163 42.926,39.624 45.339,42.037 45.339,44.196 45.974,44.831 45.974,46.101 v1@45.212,46.863 ; v3@42.799,20.32 ccw(c42.799,21.24) 43.449,20.589 ccw(c44.1,19.939) v3@43.18,19.939 ; v1@45.339,46.609 cw(c45.339,46.302) 45.556,46.519 ; v1@45.593,46.863 ccw(c46.513,46.863) 45.862,46.213
DIGIC1: C34.2 R83.1 U1.56 | length 38.3
  Top Layer w0.254: U1.56@42.433,48.795 42.433,48.783 44.96,46.255 44.972,46.255 ; v1@45.085,45.974 45.085,46.142 44.972,46.255 ; 45.118,46.109 cw(c44.847,45.838) v1(45.212,45.72) 44.972,45.96 44.972,46.255 ; v1@45.232,45.973 cw(c45.255,46.255) 44.972,46.255
  Top Layer w0.508: R83.1@39.587,23.786 ccw(c39.252,24.121) 39.725,24.121 ccw(c40.198,24.121) R83.1@39.864,23.786 ; C34.2@39.591,24.96 cw(c39.267,24.636) 39.725,24.636 ; R83.1@39.725,23.647 39.725,25.094 C34.2@39.73,25.098 41.577,25.098 v1(41.91,24.765) ; 39.725,24.615 cw(c40.213,24.615) 39.868,24.96 cw(c40.203,24.625) 40.203,25.098 cw(c40.203,25.572) C34.2@39.868,25.237 ; 40.799,25.098 cw(c40.799,23.654) v1@41.82,24.675
  Bottom Layer w0.254: v1(41.91,24.765) 42.545,24.765 43.053,25.273 43.053,30.226 42.164,31.115 42.164,33.147 42.418,33.401 42.418,39.878 44.831,42.291 44.831,44.323 45.276,44.768 45.276,45.784 v1@45.085,45.974 ; v1@42.09,24.585 cw(c42.523,24.152) 42.523,24.765 cw(c42.523,25.378) v1@42.09,24.945 ; v1@45.032,45.54 cw(c44.445,44.953) 45.276,44.953 ; 45.276,45.26 cw(c45.672,45.26) v1@45.392,45.54
DIGICI0: J7.5 R63.2 R67.1 R71.1 | length 23.1
  Top Layer w0.305: v1(32.893,13.843) 33.274,13.462 35.853,13.462 R63.2@38.038,15.647 ; 37.342,14.951 cw(c38.303,13.99) R63.2@38.303,15.349 ; R63.2@37.862,15.471 cw(c38.303,15.031) R63.2@38.303,15.654
  Top Layer w0.508: R63.2@38.038,15.647 R63.2@38.303,15.647 41.123,15.647 R67.1@41.148,15.672 ; R63.2@38.441,15.508 cw(c38.776,15.173) 38.776,15.647 cw(c38.776,16.12) R63.2@38.441,15.785 ; 39.192,15.647 ccw(c39.192,16.206) R71.1@39.587,15.81 ; R71.1@39.701,15.647 R71.1@39.726,15.672 ; R71.1@39.865,15.81 ccw(c40.26,16.206) 40.26,15.647 ; 40.614,15.647 ccw(c40.614,16.206) R67.1@41.01,15.81
  Bottom Layer w0.305: v1@32.731,13.681 cw(c32.341,13.291) 32.893,13.291 cw(c33.445,13.291) v1@33.055,13.681 ; v1(32.893,13.843) 32.893,10.287 34.056,9.124 J7.5@36.046,9.124 ; J7.5@35.659,8.736 ccw(c34.724,7.802) 34.724,9.124 ccw(c34.724,10.446) J7.5@35.659,9.511
DIGICI1: J7.6 R83.2 R84.1 R91.1 R92.1 | length 31.9
  Top Layer w0.508: v3@35.687,22.352 35.941,22.098 R91.1@36.856,22.098 ; v3@36.014,22.508 ccw(c36.856,23.166) R91.1@36.856,22.098 ; 36.347,22.098 cw(c36.347,21.538) R91.1@36.743,21.934 ; R91.1@37.02,21.934 cw(c37.354,21.599) 37.354,22.073 cw(c37.354,22.546) R91.1@37.02,22.211 ; R92.1@38.165,21.934 ccw(c37.83,21.599) 37.83,22.073 ccw(c37.83,22.546) R92.1@38.165,22.211 ; R92.1@38.442,21.934 cw(c38.777,21.599) 38.777,22.073 cw(c38.777,22.546) R92.1@38.442,22.211 ; 39.191,22.073 cw(c39.191,21.513) R83.2@39.587,21.909 ; R83.2@39.864,21.909 cw(c40.259,21.513) 40.259,22.073 ; R84.1@41.01,21.934 ccw(c40.675,21.599) 40.675,22.073 ccw(c40.675,22.546) R84.1@41.01,22.211 ; R84.1@41.148,22.073 R92.1@38.304,22.073 R91.1@36.881,22.073 R91.1@36.856,22.098
  Bottom Layer w0.508: 34.114,7.802 ccw(c35.046,8.734) J7.6@35.046,7.416 ; 34.355,7.56 cw(c33.765,6.97) J7.6@34.6,6.97 ; J7.6@35.046,6.87 31.877,10.039 31.877,18.415 v3(35.814,22.352) ; v3@35.56,22.352 cw(c34.947,22.352) 35.38,21.918 cw(c35.814,21.485) v3@35.814,22.098
DIGID0: C29.1 R72.2 U1.64 | length 48.8
  Top Layer w0.254: U1.64@45.261,51.623 48.116,48.768 49.276,48.768 v1(49.53,48.514) ccw(c48.917,47.901) 48.917,48.768 ; v1@47.371,25.654 cw(c47.371,25.041) 47.805,25.474 cw(c48.238,25.908) v1@47.625,25.908 ; v1(47.371,25.908) 47.879,25.4 47.879,19.939 49.784,18.034 51.207,18.034 ; 48.304,48.768 cw(c48.304,47.288) v1@49.35,48.334
  Top Layer w0.508: R72.2@51.068,17.41 ccw(c50.734,17.745) 51.207,17.745 ccw(c51.68,17.745) R72.2@51.345,17.41 ; C29.1@51.202,18.717 51.207,18.712 51.207,18.034 R72.2@51.207,17.272 ; C29.1@51.064,18.578 cw(c50.719,18.233) 51.207,18.233 ; C29.1@51.064,18.578 cw(c50.719,18.233) 51.207,18.233 ; C29.1@51.064,18.578 cw(c50.719,18.233) 51.207,18.233 ; 51.207,18.254 cw(c51.665,18.254) C29.1@51.341,18.578 ; 51.207,18.254 cw(c51.665,18.254) C29.1@51.341,18.578 ; 51.207,18.254 cw(c51.665,18.254) C29.1@51.341,18.578
  Bottom Layer w0.254: v1@47.191,26.088 ccw(c46.758,26.521) 47.371,26.521 ccw(c47.984,26.521) v1@47.551,26.088 ; v1(47.371,25.908) 47.371,32.512 48.26,33.401 48.26,34.29 49.911,35.941 49.911,47.498 49.53,47.879 v1(49.53,48.514) ; v1@49.35,48.334 cw(c48.917,47.901) 49.53,47.901 cw(c50.143,47.901) v1@49.71,48.334
DIGID1: C31.2 R77.1 U1.65 | length 40.3
  Top Layer w0.254: U1.65@45.615,51.977 48.315,49.276 v1(50.165,49.276) ; v1@49.985,49.096 ccw(c49.552,48.663) 49.552,49.276 ccw(c49.552,49.889) v1@49.985,49.456
  Top Layer w0.508: C31.2@49.382,24.902 cw(c49.382,24.429) 49.716,24.764 cw(c50.051,25.098) C31.2@49.578,25.098 ; C31.2@49.382,25.098 50.19,24.29 R77.1@50.19,23.647 ; C31.2@49.401,25.079 cw(c47.97,23.647) R77.1@49.994,23.647 ; C31.2@49.703,24.777 ccw(c50.038,25.111) v1@50.038,24.638 ; v1@49.948,24.421 cw(c49.364,23.837) R77.1@50.19,23.837 ; R77.1@50.051,23.786 ccw(c49.717,24.121) 50.19,24.121 ccw(c50.663,24.121) R77.1@50.329,23.786 ; v1@50.268,24.212 cw(c49.704,23.647) R77.1@50.502,23.647
  Bottom Layer w0.254: v1@49.858,24.691 ccw(c49.425,25.124) 50.038,25.124 ccw(c50.651,25.124) v1@50.218,24.691 ; v1@49.911,24.638 v1(50.038,24.511) 50.038,29.337 49.784,29.591 49.784,31.75 50.038,32.004 50.038,34.925 50.419,35.306 50.419,47.879 50.292,48.006 50.292,49.149 v1(50.165,49.276) ; v1@49.985,49.096 cw(c49.245,48.356) 50.292,48.356
DIGIDI0: J8.5 R64.2 R68.1 R72.1 | length 21.1
  Top Layer w0.305: R68.1@49.574,15.461 cw(c49.066,14.953) 49.784,14.953 cw(c50.503,14.953) R68.1@49.995,15.461 ; v1@49.622,14.259 ccw(c49.231,14.65) 49.784,14.65 ; v1(49.784,14.097) R68.1@49.784,15.672 ; 49.784,14.648 ccw(c50.335,14.648) v1@49.946,14.259
  Top Layer w0.508: R68.1@49.784,15.672 R72.1@51.207,15.672 52.603,15.672 R64.2@52.628,15.647 ; R68.1@49.923,15.533 cw(c50.258,15.199) 50.258,15.672 cw(c50.258,16.145) R68.1@49.923,15.81 ; R72.1@51.068,15.533 ccw(c50.734,15.199) 50.734,15.672 ccw(c50.734,16.145) R72.1@51.068,15.81 ; R72.1@51.345,15.533 cw(c51.68,15.199) 51.68,15.672 cw(c51.68,16.145) R72.1@51.345,15.81 ; 52.094,15.672 cw(c52.094,15.113) R64.2@52.49,15.508
  Bottom Layer w0.305: 48.743,13.437 cw(c49.784,12.397) v1@49.784,13.868 ; 49.264,13.958 cw(c49.784,13.437) v1@49.784,14.173 ; v1(49.784,14.097) 49.403,14.097 48.514,13.208 48.514,9.525 48.915,9.124 J8.5@51.176,9.124 ; J8.5@50.789,8.736 ccw(c49.854,7.802) 49.854,9.124 ccw(c49.854,10.446) J8.5@50.789,9.511
DIGIDI1: J8.6 R77.2 R78.1 R85.1 R86.1 | length 31.1
  Top Layer w0.508: R78.1@49.009,21.934 cw(c49.343,21.599) 49.343,22.073 cw(c49.343,22.546) R78.1@49.009,22.211 ; v1@49.417,22.409 cw(c48.87,22.685) R78.1@48.87,22.073 R77.2@50.165,22.073 ; v1@49.645,22.405 ccw(c50.165,22.645) R77.2@50.165,22.073 ; v1@49.656,22.073 cw(c49.656,21.513) R77.2@50.051,21.909 ; R77.2@49.962,22.073 R77.2@49.987,22.047 ; R77.2@50.329,21.909 cw(c50.663,21.574) 50.663,22.047 cw(c50.663,22.521) R77.2@50.329,22.186 ; 51.079,22.047 ccw(c51.079,22.607) R86.1@51.475,22.211 ; R86.1@51.752,22.211 ccw(c52.147,22.607) 52.147,22.047 ; 52.502,22.047 ccw(c52.502,22.607) R85.1@52.897,22.211 ; R85.1@52.832,22.073 52.807,22.047 R77.2@50.19,22.047 R77.2@50.165,22.073
  Bottom Layer w0.305: 49.07,7.975 ccw(c50.176,9.081) J8.6@50.176,7.517 ; 49.312,7.734 cw(c48.548,6.97) J8.6@49.628,6.97 ; v1(49.53,22.352) 49.149,22.733 48.006,22.733 47.752,22.479 47.752,19.05 49.276,17.526 49.276,14.732 47.879,13.335 47.879,9.167 J8.6@50.176,6.87 ; 49.591,7.455 ccw(c50.176,8.04) J8.6@50.176,7.212
DIRA: C45.2 R113.1 U1.132 | length 62.9
  Top Layer w0.254: 22.987,63.29 cw(c24.467,63.29) v1@23.421,64.336 ; 22.987,63.903 cw(c23.854,63.903) v1(23.241,64.516) 22.987,64.262 22.987,63.291 U1.132@24.048,62.23
  Bottom Layer w0.254: C45.2@12.268,105.436 cw(c13.125,104.579) 13.125,105.791 ; C45.2@12.399,105.305 12.885,105.791 14.605,105.791 14.986,105.41 14.986,102.616 14.224,101.854 14.224,96.647 18.605,92.266 19.241,92.266 19.558,91.948 21.082,91.948 21.895,91.135 21.895,84.125 21.844,84.074 ; C45.2@12.448,105.256 cw(c13.739,103.966) 13.739,105.791 ; C45.2@12.628,105.077 cw(c14.352,103.353) 14.352,105.791 ; 21.844,83.693 21.844,84.074 ; v1@22.987,64.516 ccw(c22.374,64.516) 22.807,64.95 ccw(c23.241,65.383) v1@23.241,64.77 ; v1(23.241,64.516) 21.209,66.548 21.209,68.707 20.955,68.961 20.955,74.803 21.844,75.692 21.844,84.074
  Bottom Layer w0.508: R113.1@10.973,105.283 10.995,105.305 C45.2@12.399,105.305 ; R113.1@11.112,105.144 cw(c11.5,104.756) 11.5,105.305 ; C45.2@12.261,105.167 ccw(c11.926,104.832) 11.926,105.305 ccw(c11.926,105.778) C45.2@12.261,105.444
DIRB: C46.2 R114.1 U1.127 | length 56.6
  Top Layer w0.254: 24.636,65.177 cw(c25.245,65.786) v1(24.384,65.786) 24.384,65.429 U1.127@25.816,63.998 ; v1@24.638,65.786 ccw(c26.113,65.786) 25.07,64.743
  Bottom Layer w0.254: C46.2@23.27,105.305 23.883,105.918 25.146,105.918 25.4,105.664 ; C46.2@23.27,105.628 ccw(c23.27,106.408) 23.822,105.857 ccw(c24.373,105.305) C46.2@23.593,105.305 ; 24.13,66.399 ccw(c24.997,66.399) v1(24.384,65.786) ; 24.13,67.012 ccw(c25.61,67.012) v1@24.564,65.966 ; v1@24.447,65.722 v1(24.384,65.786) ; 25.527,103.251 25.273,102.997 ; 25.527,105.537 25.4,105.664 ; v1(24.384,65.786) 24.13,66.04 24.13,68.961 22.987,70.104 22.987,73.406 24.613,75.032 24.613,79.019 23.368,80.264 23.368,92.202 23.241,92.329 23.241,93.472 23.749,93.98 24.384,93.98 24.765,94.361 24.765,100.203 24.257,100.711 24.257,101.981 25.273,102.997 ; 25.273,102.997 25.654,103.378 25.654,105.41 25.4,105.664
  Bottom Layer w0.508: R114.1@21.844,105.283 23.248,105.283 C46.2@23.27,105.305 ; R114.1@21.983,105.144 cw(c22.318,104.81) 22.318,105.283 cw(c22.318,105.756) R114.1@21.983,105.422 ; 22.744,105.283 ccw(c22.744,105.832) C46.2@23.132,105.444
DIRC: C53.2 R131.1 U1.117 | length 49.7
  Top Layer w0.254: v1@27.855,69.103 cw(c27.748,68.802) 28.067,68.802 ; v1@28.067,69.342 28.067,68.817 U1.117@29.351,67.533
  Bottom Layer w0.254: v1@27.994,69.59 ccw(c28.1,70.071) 28.448,69.723 ; v1@28.067,69.342 28.448,69.723 ; v1@28.194,69.342 cw(c28.501,69.342) 28.284,69.559 ; C53.2@34.853,105.305 36.068,105.305 36.681,105.305 36.957,105.029 36.957,102.489 35.433,100.965 35.433,93.091 ; C53.2@35.081,105.077 cw(c35.633,104.525) 35.633,105.305 cw(c35.633,106.085) C53.2@35.081,105.534 ; 35.433,92.202 35.433,93.091 ; 28.448,69.723 28.448,79.248 30.861,81.661 30.861,86.868 35.433,91.44 35.433,93.091
  Bottom Layer w0.508: R131.1@33.427,105.283 C53.2@34.831,105.283 ; R131.1@33.565,105.144 cw(c33.9,104.81) 33.9,105.283 cw(c33.9,105.756) R131.1@33.565,105.422 ; 34.326,105.283 ccw(c34.326,105.832) C53.2@34.714,105.444
  other v1: 27.94,69.342
DIRD: C54.2 R132.1 U1.115 | length 72.9
  Top Layer w0.254: v1@30.046,75.258 cw(c29,74.212) 30.48,74.212 ; U1.115@30.058,68.24 29.083,69.215 29.083,70.231 28.575,70.739 28.575,73.533 28.829,73.787 30.226,73.787 30.48,74.041 30.48,75.184 v1(30.226,75.438) cw(c29.613,74.825) 30.48,74.825 ; v1(35.433,88.519) 40.767,88.519 41.656,89.408 41.656,92.329 45.085,95.758 v1(45.212,95.758) ; v1@35.613,88.339 cw(c36.046,87.906) 36.046,88.519 cw(c36.046,89.132) v1@35.613,88.699 ; 44.562,95.235 cw(c45.212,94.584) v1@45.212,95.504 ; v1(44.831,98.933) 46.99,98.933 49.403,101.346 49.403,105.283 48.768,105.918 v1(47.879,105.918) ; 44.868,95.541 ccw(c44.651,95.758) v1@44.958,95.758 ; v1@45.011,98.753 cw(c45.444,98.32) 45.444,98.933 cw(c45.444,99.546) v1@45.011,99.113 ; v1@48.059,105.738 cw(c48.492,105.305) 48.492,105.918 cw(c48.492,106.531) v1@48.059,106.098
  Bottom Layer w0.254: 29.972,76.051 ccw(c30.839,76.051) v1(30.226,75.438) 29.972,75.692 29.972,78.613 32.385,81.026 32.385,86.36 33.909,87.884 34.798,87.884 v1(35.433,88.519) ; 29.972,76.664 ccw(c31.452,76.664) v1@30.406,75.618 ; v1@35.179,88.519 cw(c34.566,88.519) 34.999,88.085 cw(c35.433,87.652) v1@35.433,88.265 ; C54.2@43.989,105.312 44.087,105.41 45.974,105.41 46.482,105.918 v1(47.879,105.918) ; C54.2@44.217,105.083 cw(c45.006,104.294) 45.006,105.41 ; C54.2@44.217,105.54 ccw(c44.531,105.854) 44.531,105.41 ; v1(44.831,98.933) 45.212,98.552 v1(45.212,95.758) ; v1@45.032,95.938 ccw(c44.599,96.371) 45.212,96.371 ccw(c45.825,96.371) v1@45.392,95.938 ; v1@47.699,105.738 ccw(c47.266,105.305) 47.266,105.918 ccw(c47.266,106.531) v1@47.699,106.098
  Bottom Layer w0.508: R132.1@42.672,105.283 42.695,105.305 C54.2@43.989,105.305 ; R132.1@42.811,105.144 cw(c43.199,104.756) 43.199,105.305 ; 43.5,105.305 ccw(c43.5,105.8) C54.2@43.85,105.45 ; 43.531,105.305 cw(c43.531,104.854) C54.2@43.85,105.173